# Altium PCB PCB1.PcbDoc
Units mm, origin at the board's own origin, x right, y up, seen from the top; angles counter-clockwise.
Board outline 65.28 x 35.31 mm, 2 copper layers (Top Layer, Bottom Layer); 25 components, 17 nets, 101 pads, 57 vias.
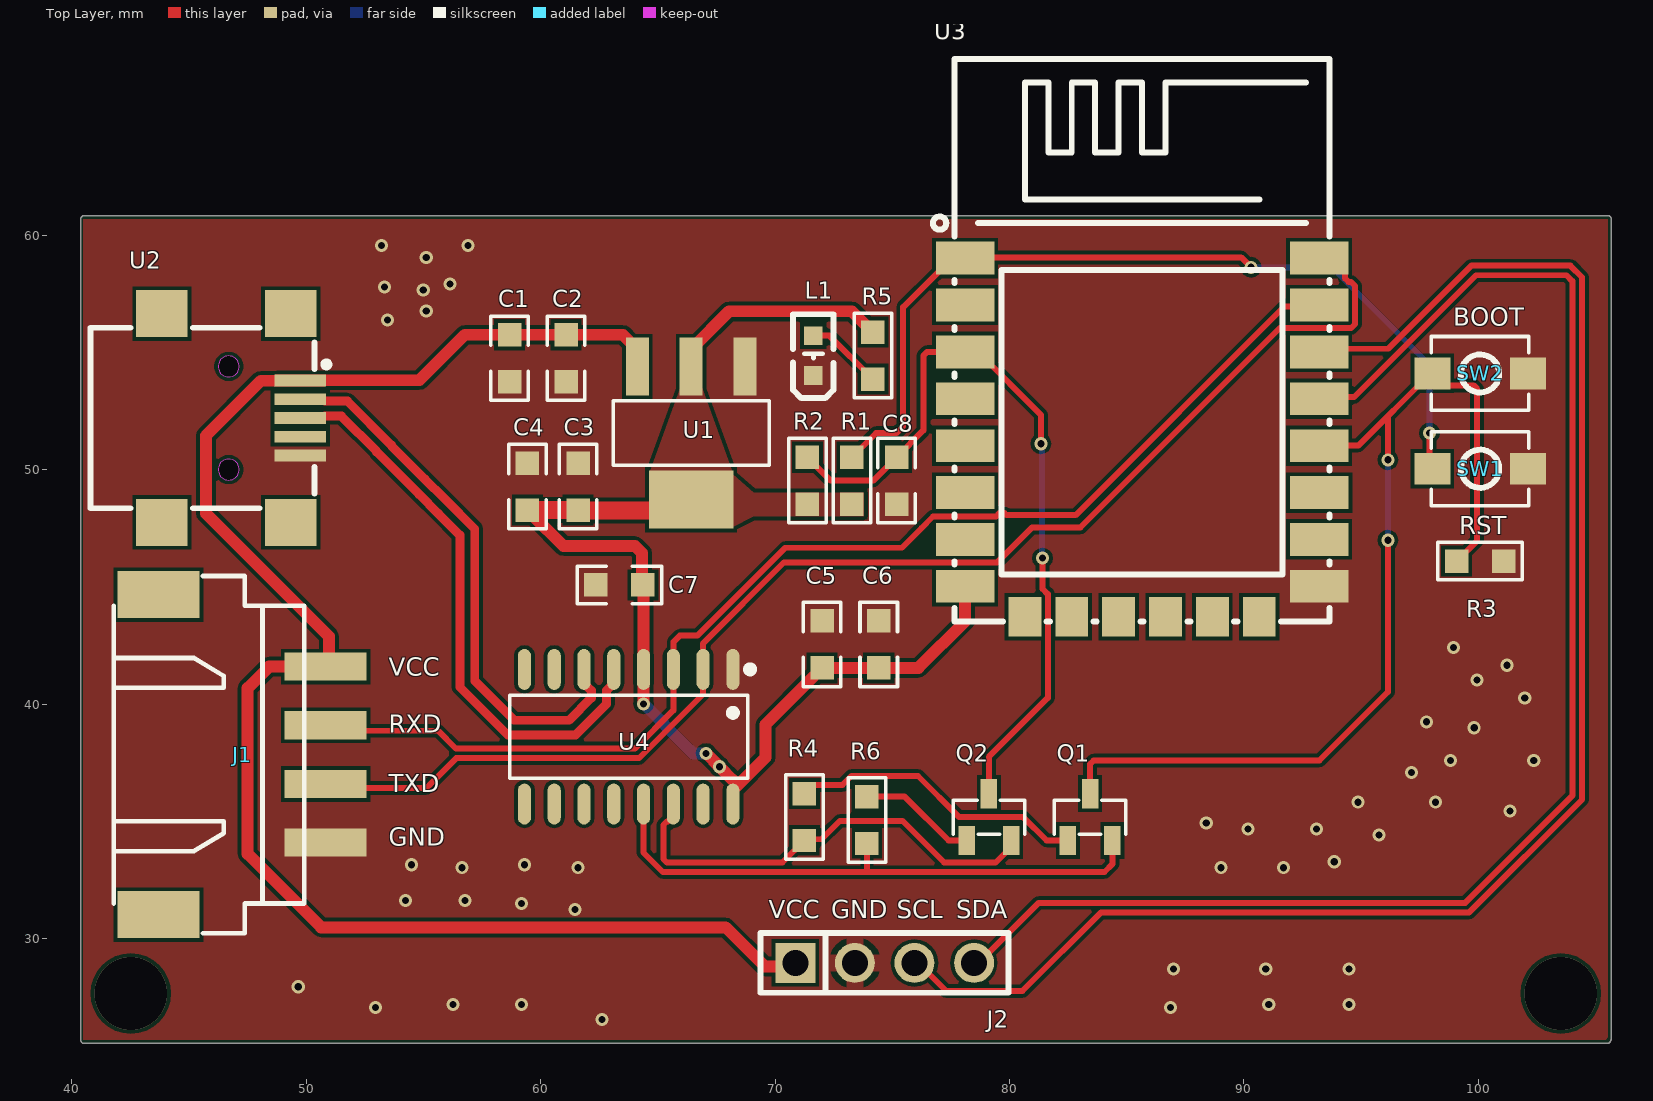
[diagram p0: Top Layer view]
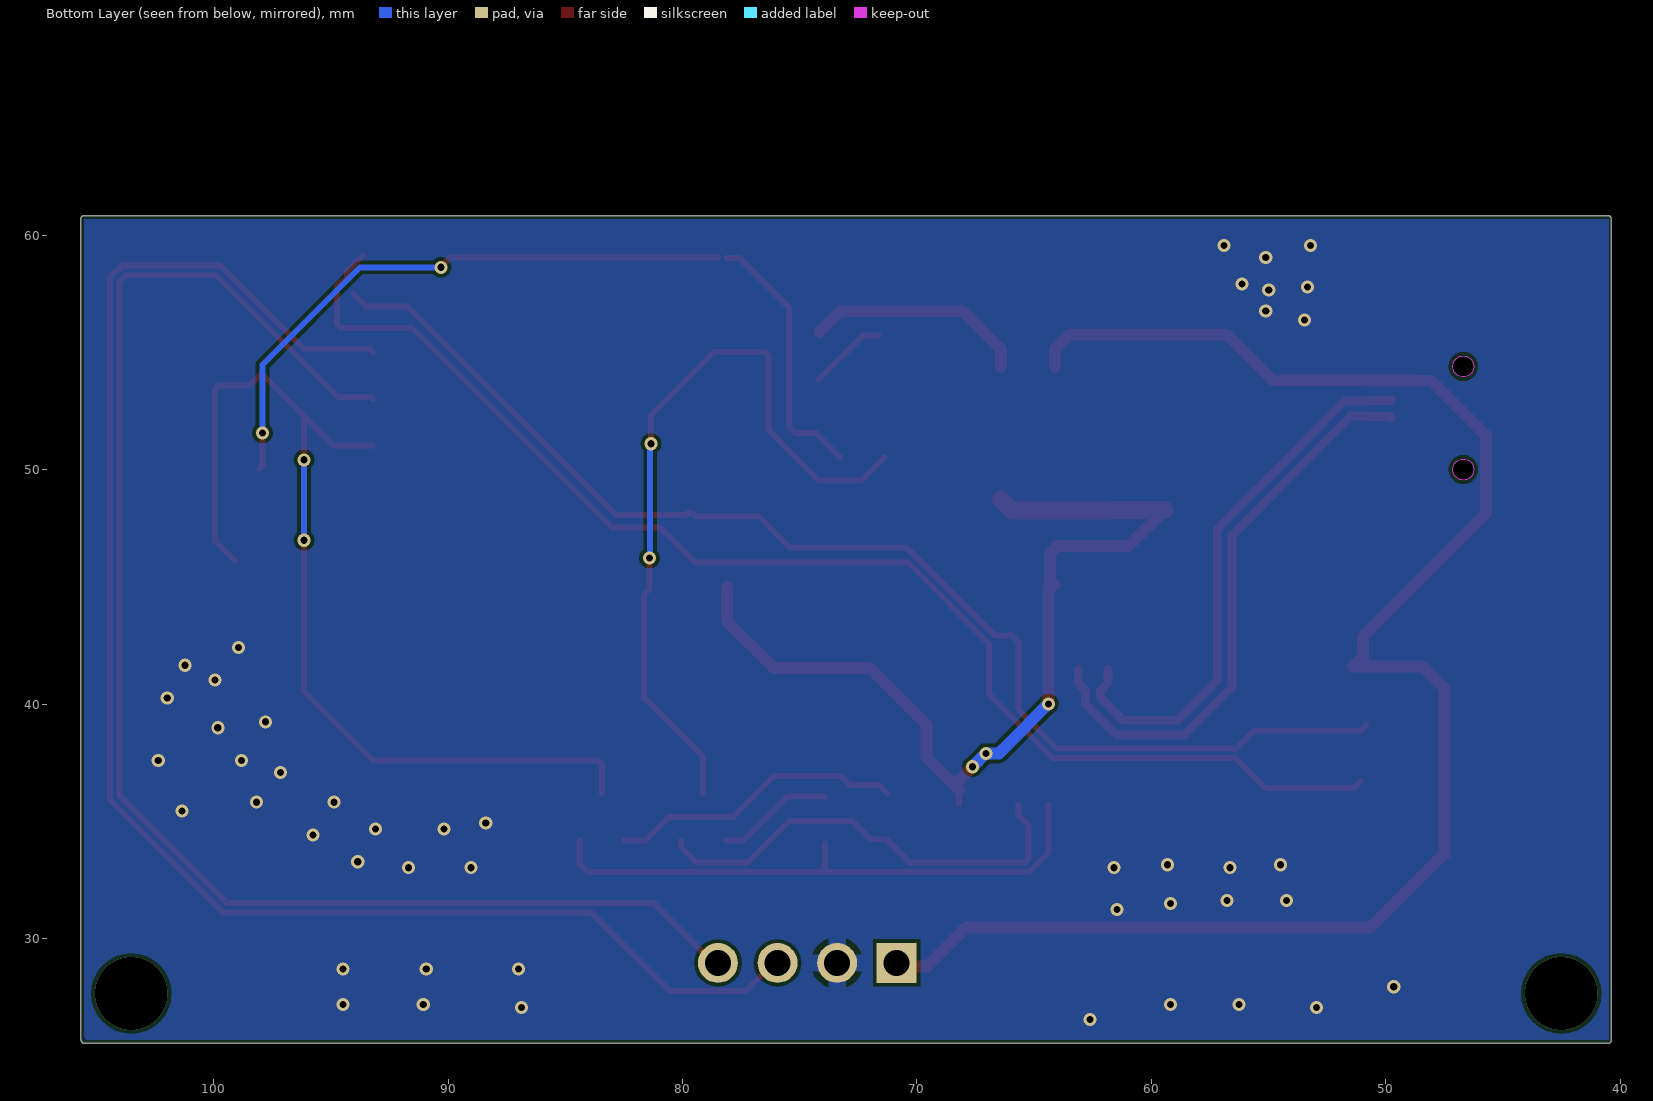
[diagram p1: Bottom Layer view, seen from below]

## Layer stack, top to bottom
Top Solder: solder mask 0.0102, Solder Resist, Dk 3.5
Top Layer: signal copper 0.0356
Dielectric 1: dielectric 0.32, FR-4, Dk 4.8
Bottom Layer: signal copper 0.0356
Bottom Solder: solder mask 0.0102, Solder Resist, Dk 3.5

## Board outline
40.388,25.68 cw(c40.513,25.706) 40.386,25.706 40.386,60.706 cw(c40.513,60.706) 40.513,60.833 105.513,60.833 cw(c105.513,60.706) 105.525,60.833 cw(c105.537,60.706) 105.664,60.706 105.664,25.706 cw(c105.537,25.706) 105.638,25.628 cw(c105.513,25.654) 105.513,25.527 40.513,25.527 cw(c40.513,25.654)

## Design rules (kind name [scope] priority, off if disabled: settings)
Clearance [All] p1: gap=0.152 ignorepadtopadclearanceinfootprint=FALSE
DiffPairsRouting [All] p1: maxlimit=0.254 minlimit=0.254 mostfreqgap=0.254 toplayer_minwidth=0.152 toplayer_maxwidth=0.381 toplayer_prefwidth=0.152 bottomlayer_minwidth=0.152 bottomlayer_maxwidth=0.381 bottomlayer_prefwidth=0.152 maxuncoupledlength=12.7
PolygonConnect [All] p1: thpad.connectstyle=Relief thpad.reliefconductorwidth=0.762 thpad.reliefentries=4 thpad.polygonreliefangle="90 Angle" thpad.airgapwidth=0.254 smdpad.connectstyle=Direct smdpad.reliefconductorwidth=0.762 smdpad.reliefentries=4 smdpad.polygonreliefangle="90 Angle" smdpad.airgapwidth=0.127 via.connectstyle=Direct via.reliefconductorwidth=0.254 via.reliefentries=4 via.polygonreliefangle="90 Angle" via.airgapwidth=0.254
RoutingVias [All] p1: holewidth=0.305 width=0.559 viastyle="Through Hole" minholewidth=0.305 minwidth=0.559 maxholewidth=0.305 maxwidth=0.559
SolderMaskExpansion [All] p1: expansion=0.102 istentingtop=FALSE
Width PWR [InNetClass('PWR')] p1: maxlimit=2.286 minlimit=0.508 preferedwidth=0.508
Width [All] p2: maxlimit=0.254 minlimit=0.254 preferedwidth=0.254
29 further rules are at their usual default settings.

## Classes and differential pairs
differential pair D: +D_P -D_N

## Components (designator, comment, footprint, x,y, rotation, side; value= is the part's Value field where it differs from the comment)
C1 "100nF" 0805C 58.674,54.753 r90 top
C2 "10uF" 0805C 61.087,54.753 r90 top
C3 "100nF" 0805C 61.595,49.276 r270 top
C4 "10uF" 0805C 59.436,49.276 r270 top
C5 "100nF" 0805C 72.009,42.545 r270 top
C6 "10uF" 0805C 74.422,42.545 r270 top
C7 "100nF" 0805C 63.357,45.085 r180 top
C8 "1uF" 0805C 75.184,49.53 r90 top
J1 "SIP4" XH2.54-WS-4P 45.847,37.846 r270 top
J2 "SIP4" SIP_4P-P2.54-V-F 74.676,28.956 r0 top
L1 "LED" LED0603-R-RD_GREEN 71.628,54.864 r90 top
Q1 "SS8050" SOT-23-3_L2.9-W1.3-P1.90-LS2.4-BR 83.439,35.179 r270 top
Q2 "SS8050" SOT-23-3_L2.9-W1.3-P1.90-LS2.4-BR 79.121,35.179 r270 top
R1 "10k" 0805R 73.279,49.53 r90 top
R2 "10k" 0805R 71.374,49.53 r90 top
R3 "10k" 0805R 100.076,46.101 r0 top
R4 "10k" 0805R 71.247,35.179 r90 top
R5 "1k" 0805R 74.168,54.864 r270 top
R6 "10k" 0805R 73.914,35.052 r90 top
SW1 "TS342A2P 250gf-WZ 021_C2987973" SW-SMD_L4.0-W2.9-LS5.0 100.076,50.038 r0 top
SW2 "TS342A2P 250gf-WZ 021_C2987973" SW-SMD_L4.0-W2.9-LS5.0 100.076,54.102 r0 top
U1 "Ams1117" SOT-223-4_L6.5-W3.5-P2.30-LS7.0-BR 66.421,51.562 r90 top
U2 "USB" USB-SMD_MINI-5PTP 46.794,52.203 r270 top
U3 "ESP-12F(ESP8266MOD)" ESP-12F_SMD 85.656,51.372 r270 top value=2.4GHz
U4 "CH340C" SOP16_L10.0-W3.9-P1.27-LS6.0-BL 63.754,38.608 r180 top

## Footprints (in the part's own frame and the unit in brackets; to place one, negate y for a bottom-side part, rotate by r counter-clockwise, add the part's x,y. Pads: shape width x height; smd on the part's side, far side on the other; paste and mask are expansions set on the pad)
0805C [mm]
  rect 1x1 smd: 1(-1,0) 2(1,0)
  silkscreen extent -1.8,-0.8 1.8,0.8
0805R [mm]
  rect 1x1 smd: 1(-1,0) 2(1,0)
  silkscreen extent -1.8,-0.8 1.8,0.8
ESP-12F_SMD [mm]
  rect 1.4x2.5 smd mask+0.051: 1(-7.651,-7.551) 2(-5.651,-7.551) 3(-3.651,-7.551) 4(-1.651,-7.551) 5(0.349,-7.551) 6(2.349,-7.551) 7(4.349,-7.551) 8(6.349,-7.551) 9(6.349,7.549) 10(4.349,7.55) 11(2.349,7.551) 12(0.349,7.551) 13(-1.651,7.55) 14(-3.651,7.551) 15(-5.651,7.55) 16(-7.651,7.551)
  rect 1.7x1.4 smd mask+0.051: 17(7.651,-5) 18(7.649,-3.002) 19(7.65,-1.003) 20(7.65,0.997) 21(7.65,2.997) 22(7.65,4.997)
  silkscreen extent -16.15,-8.92 7.85,8
LED0603-R-RD_GREEN [mm]
  rect 0.8x0.8 smd mask+0.051: 1(0.851,0) 2(-0.851,0)
  silkscreen extent -1.82,-0.86 1.77,0.86
SIP_4P-P2.54-V-F [mm]
  rect 1.7x1.7 hole 1.1 mask+0.051: 1(-3.81,0)
  round 1.7 hole 1.1 mask+0.051: 2(-1.27,0) 3(1.27,0) 4(3.81,0)
  silkscreen extent -5.29,-1.27 5.29,1.27
SOP16_L10.0-W3.9-P1.27-LS6.0-BL [mm] "CH340C"
  oval 0.56x1.745 smd mask+0.051: 1(-4.445,-2.872) 2(-3.175,-2.872) 3(-1.905,-2.872) 4(-0.635,-2.872) 5(0.635,-2.872) 6(1.905,-2.872) 7(3.175,-2.872) 8(4.445,-2.872) 9(4.445,2.872) 10(3.175,2.872) 11(1.905,2.872) 12(0.635,2.872) 13(-0.635,2.872) 14(-1.905,2.872) 15(-3.175,2.872) 16(-4.445,2.872)
  silkscreen extent -5.33,-3.02 5.08,1.77
SOT-23-3_L2.9-W1.3-P1.90-LS2.4-BR [mm]
  rect 1.25x0.7 smd mask+0.051: 1(1,-0.95) 2(1,0.95) 3(-1,0)
  silkscreen extent -0.73,-1.53 0.73,1.53
SOT-223-4_L6.5-W3.5-P2.30-LS7.0-BR [mm] "AMS1117"
  rect 2.47x0.98 smd mask+0.051: 1(2.835,-2.3) 2(2.835,0) 3(2.835,2.3)
  rect 2.47x3.6 smd mask+0.051: 4(-2.835,0)
  silkscreen extent -1.37,-3.33 1.37,3.33
SW-SMD_L4.0-W2.9-LS5.0 [mm]
  rect 1.53x1.36 smd mask+0.051: 1(-2.035,0) 2(2.035,0)
  silkscreen extent -2.08,-1.58 2.08,1.58
USB-SMD_MINI-5PTP [mm]
  rect 0.5x2.2 smd mask+0.051: 1(-1.6,2.95) 2(-0.8,2.95) 3(0,2.95) 4(0.8,2.95) 5(1.6,2.95)
  rect 2x2.2 smd mask+0.051: 6(-4.45,2.55) 7(4.45,2.55) 8(4.45,-2.95) 9(-4.45,-2.95)
  Keep-Out Layer board cut-out: -1.75,-0.1 -1.795,0.095 -1.919,0.252 -2.1,0.339 -2.3,0.339 -2.481,0.252 -2.605,0.095 -2.65,-0.1 -2.65,-0.1 -2.605,-0.295 -2.481,-0.452 -2.3,-0.539 -2.1,-0.539 -1.919,-0.452 -1.795,-0.295 -1.75,-0.1
  Keep-Out Layer board cut-out: 2.65,-0.1 2.605,0.095 2.481,0.252 2.3,0.339 2.1,0.339 1.919,0.252 1.795,0.095 1.75,-0.1 1.75,-0.1 1.795,-0.295 1.919,-0.452 2.1,-0.539 2.3,-0.539 2.481,-0.452 2.605,-0.295 2.65,-0.1
  silkscreen extent -3.85,-6 3.85,4.19
XH2.54-WS-4P [mm] "长：15mm，宽：8mm，高：6.1mm"
  rect 2x3.5 smd: 0(-6.827,-2.15) 0(6.827,-2.15)
  rect 1.2x3.5 smd: 1(-3.75,4.981) 2(-1.25,4.981) 3(1.25,4.981) 4(3.75,4.981)
  silkscreen extent -7.62,-4.06 7.62,4.06, body extent -7.5,-4 7.5,6.42, height 6.05

## Part data
C1 C2 C3 C4 C5 C6 C7 C8: library part CAP, "电容"
J1 J2: "jointbar"
R1 R2 R3 R4 R5 R6: library part RES, "电阻"
SW1 SW2: library part SW, Actuator/Cap Color=黑色, Contact Current=50mA, Insulation Resistance=100MΩ, JLCPCB Part Class="Extended Part", LCSC Part Name="TS342A2P 250gf-WZ 021", Manufacturer="SHOU HAN(首韩)", Operating Force=250gf@±50gf, Operating Temperature=-20℃~+70℃, Voltage Rating (DC)=12V, Actuator Style=圆形按钮, Add into BOM=yes, Circuit=单刀单掷, Convert to PCB=yes, Datasheet=https://atta.szlcsc.com/upload/public/pdf/source/20211019/B0840D9D2EDA6B165E59EB2CD177CDC8.pdf, Device="TS342A2P 250gf-WZ 021_C2987973", Manufacturer Part="TS342A2P 250gf-WZ 021", Mechanical Life=100000, Mounting Style=立贴, Name="TS342A2P 250gf-WZ 021", Pin Style=SMD接片, Strike Gundam=否, Supplier=LCSC, Supplier Footprint=SMD, Supplier Part=C2987973, Switch Height=2mm, Switch Length=3.95mm, Switch Width=2.9mm, Symbol="TS342A2P 250GF-WZ 021_C2987973"
U3: JLCPCB Part Class="Extended Part", Manufacturer=Ai-Thinker(安信可), Operating Temperature=-40℃~+85℃, Operating Voltage=3.3V, Output Power=16dBm, Receive  Current=120mA, Send  Current=170mA, Add into BOM=yes, Antenna Type="PCB 板载天线", Convert to PCB=yes, Core Processor=ESP8266, Datasheet=https://atta.szlcsc.com/upload/public/pdf/source/20210219/C82891_ABD84A460F4F056A2757267CCCA4B508.pdf, Device=ESP-12F(ESP8266MOD), LCSC Part Name=ESP-12F(ESP8266MOD), Manufacturer Part=ESP-12F(ESP8266MOD), Name=2.4GHz, Sensitivity=-90dBm, Supplier=LCSC, Supplier Footprint="WIFI Module", Supplier Part=C82891, Support Interface=GPIO；UART；IIC；PWM；SPI；ADC, Symbol=ESP-12F(ESP8266MOD), Wireless Standard=802.11b/g/n
U4: JLCPCB Part Class="Extended Part", Manufacturer=WCH(南京沁恒), Supply Voltage=3.3V；5V, Add into BOM=yes, Applications Function=Transceiver, Convert to PCB=yes, Data Rate=2Mbps, Datasheet=https://atta.szlcsc.com/upload/public/pdf/source/20200819/C84681_ADBED554CE321879DBD6B1D06488689C.pdf, Device=CH340C, LCSC Part Name=CH340C, Manufacturer Part=CH340C, Name=CH340C, Protocol="USB 2.0", Supplier=LCSC, Supplier Footprint=SOP-16, Supplier Part=C84681, Symbol=CH340C

## Via types
v1: diameter 0.559, hole 0.305, Top Layer to Bottom Layer, tented both sides, 55 vias
v2: diameter 3.1, hole 3.1, Top Layer to Bottom Layer, 2 vias

## Nets (pads, with @x,y where several pads share a name; then routed paths per layer and width w, separated by ;. In a path a pad name is that pad's centre, name@x,y a point inside that pad or via, vN(x,y) a via of type N, cw(c..) or ccw(c..) an arc to the next point about the centre after c; other vN are vias at no path point)
3.3V: C3.2 C4.2 C5.2 C6.2 C7.1 R1.1 R2.1 R5.1 U1.2 U1.4 U3.8 U4.4 U4.16 | length 50.8
  Top Layer w0.254: 68.198,36.754 68.198,36.323 68.199,36.322 U4.16
  Top Layer w0.508: C4.2@59.648,48.064 60.976,46.736 64.029,46.736 64.327,46.438 64.327,45.115 C7.1 ; C7.1@64.135,45.085 64.381,44.839 64.381,44.549 64.389,44.541 U4.4 v1(64.389,40.005) ; U1.2 66.421,55.142 68.034,56.755 73.277,56.755 R5.1 ; v1(67.057,37.895) v1(67.628,37.324) 68.198,36.754 ; U4.16@68.199,36.322 68.199,36.328 69.596,37.725 69.596,39.132 C5.2 76.112,41.545 78.106,43.538 U3.8
  Top Layer w0.762: C4.2 C3.2 61.612,48.259 65.953,48.259 U1.4
  Bottom Layer w0.508: v1(64.389,40.005) 66.167,38.227 66.499,37.895 v1(67.057,37.895) v1(67.628,37.324)
D_N: U2.2 U4.6 | length 23.6
  Top Layer w0.381: U2.2 49.803,52.944 50.772,52.944 50.795,52.921 51.759,52.921 53.634,51.046 53.634,51.023 55.059,49.598 55.899,48.758 57.189,47.469 57.189,40.992 58.869,39.311 61.218,39.311 62.166,40.26 62.166,40.575 61.849,40.893 U4.6
D_P: U2.3 U4.5 | length 24.7
  Top Layer w0.381: U2.3 49.803,52.263 50.772,52.263 50.795,52.286 51.496,52.286 52.999,50.783 52.999,50.76 54.816,48.943 55.636,48.123 56.554,47.205 56.554,40.728 58.606,38.676 61.481,38.676 62.801,39.997 62.801,40.575 63.119,40.893 U4.5
DTR: Q1.2 R6.1 U4.13 | length 24.8
  Top Layer w0.254: U4.13 64.389,33.661 65.215,32.835 73.914,32.835 ; R6.1 73.914,32.835 ; Q1.2 84.389,33.173 84.051,32.835 73.914,32.835
EN: C8.2 Q2.3 R2.2 U3.3 | length 32.9
  Top Layer w0.254: R2.2 72.371,49.533 74.187,49.533 C8.2 76.327,51.673 76.327,54.864 76.486,55.023 78.655,55.023 81.339,52.339 81.339,51.247 v1@81.257,51.165 ; Q2.3 79.121,37.749 81.636,40.263 81.636,44.688 81.407,44.916 v1(81.407,46.228)
  Bottom Layer w0.254: v1(81.339,51.107) 81.377,51.069 81.377,46.258 v1(81.407,46.228)
GND: C1.1 C2.1 C3.1 C4.1 C5.1 C6.1 C7.2 C8.1 J1.4 J2.2 L1.2 R3.2 SW1.2 SW2.2 U1.1 U2.5 U3.9 U4.1
  other v1: 62.611,26.543 52.959,27.051 86.868,27.051 56.261,27.178 59.182,27.178 91.059,27.178 94.488,27.178 49.657,27.94 86.995,28.702 90.932,28.702 94.488,28.702 61.468,31.242 59.182,31.496 54.229,31.623 56.769,31.623 56.642,33.02 61.595,33.02 89.027,33.02 91.694,33.02 54.483,33.147 59.309,33.147 93.853,33.274 95.758,34.417 90.17,34.671 93.091,34.671 88.392,34.925 101.346,35.433 94.869,35.814 98.171,35.814 97.155,37.084 98.806,37.592 102.362,37.592 99.822,38.989 97.79,39.243 101.981,40.259 99.949,41.021 101.219,41.656 98.933,42.418 53.467,56.388 55.118,56.769 54.991,57.658 53.34,57.785 56.134,57.912 55.118,59.055 53.213,59.563 56.896,59.563
GPIO0: Q1.3 R3.1 SW2.1 U3.12 | length 42.9
  Top Layer w0.254: Q1.3 83.439,37.443 83.588,37.592 93.218,37.592 96.139,40.513 v1(96.139,46.99) ; U3.12 94.877,51.023 97.956,54.102 98.464,53.594 99.8,53.594 99.949,53.445 99.949,46.974 R3.1 ; v1(96.139,50.419) 96.139,52.2
  Bottom Layer w0.254: v1(96.139,46.99) v1(96.139,50.419)
NetL1_1: L1.1 R5.2 | length 3.3
  Top Layer w0.254: L1.1 72.317,55.715 R5.2
NetQ1_1: Q1.1 R4.2 | length 12.7
  Top Layer w0.254: R4.2 71.62,36.552 72.875,36.552 73.256,36.933 76.097,36.933 77.851,35.179 80.585,35.179 81.585,34.179 Q1.1
NetQ2_1: Q2.1 R6.2 | length 5
  Top Layer w0.254: R6.2 75.528,36.052 77.401,34.179 Q2.1
RST: R1.2 SW1.1 U3.1 | length 37.1
  Top Layer w0.254: R1.2 74.311,51.562 75.184,51.562 75.464,51.842 75.464,56.932 77.555,59.023 U3.1 ; U3.1@78.486,59.055 89.884,59.055 v1(90.308,58.631) ; v1(97.917,51.562) 97.917,50.162 SW1.1
  Bottom Layer w0.254: v1(90.308,58.631) 93.76,58.631 97.917,54.474 v1(97.917,51.562)
RTS: Q2.2 R4.1 U4.14 | length 19.5
  Top Layer w0.254: U4.14 65.659,35.226 65.425,34.992 65.383,34.992 65.235,34.843 65.235,33.39 65.383,33.241 70.309,33.241 71.3,34.232 71.979,34.232 72.761,35.014 75.442,35.014 77.214,33.241 79.408,33.241 80.071,33.904 Q2.2
RXD: J1.2 U3.15 U4.3 | length 53.4
  Top Layer w0.254: J1.2 51.062,38.862 55.626,38.862 56.388,38.1 64.025,38.1 65.659,39.734 U4.3 65.675,41.497 65.675,42.659 65.934,42.918 66.682,42.918 70.433,46.669 75.413,46.669 76.244,47.5 76.244,47.507 76.739,48.002 79.43,48.002 79.569,48.142 79.779,48.142 79.864,48.057 82.823,48.057 91.725,56.958 93.5,56.958 U3.15@94.041,57.499
SCL: J2.3 U3.14 | length 67.6
  Top Layer w0.254: J2.3@75.946,29.106 77.289,27.763 80.556,27.763 83.908,31.115 99.609,31.115 104.419,35.925 104.419,58.207 103.927,58.699 99.698,58.699 96.157,55.158 93.342,55.158 U3.14
SDA: J2.4 U3.13 | length 63.6
  Top Layer w0.254: J2.4@78.516,28.792 81.246,31.521 99.441,31.521 104.013,36.093 104.013,58.039 103.759,58.293 99.897,58.293 94.704,53.1 93.283,53.1 U3.13
TXD: J1.3 U3.16 U4.2 | length 56.7
  Top Layer w0.254: J1.3@51.054,36.703 51.341,36.416 55.121,36.416 56.399,37.694 64.196,37.694 66.929,40.427 66.929,42.59 70.383,46.044 79.471,46.044 80.964,47.537 83.028,47.537 91.535,56.044 94.573,56.044 94.736,56.207 94.736,57.839 94.573,58.002 94.465,58.002 94.316,58.151 94.316,58.464 U3.16@93.641,59.14
VCC: C1.2 C2.2 J1.1 J2.1 U1.3 U2.1 | length 70.2
  Top Layer w0.508: U1.3 64.121,55.142 63.51,55.753 C2.2 C1.2 56.769,55.753 54.829,53.813 50.749,53.813 50.744,53.807 49.748,53.807 49.74,53.799 48.743,53.799 48.735,53.791 48.064,53.791 45.72,51.447 45.72,48.136 50.965,42.891 50.965,41.942 51.056,41.942 51.402,41.596 J1.1 48.415,41.596 47.498,40.679 47.498,33.611 50.636,30.473 67.887,30.473 69.552,28.808 70.718,28.808 J2.1
pads on no net: J1.0 U2.4 U2.6 U2.7 U2.8 U2.9 U3.2 U3.4 U3.5 U3.6 U3.7 U3.10 U3.11 U3.17 U3.18 U3.19 U3.20 U3.21 U3.22 U4.7 U4.8 U4.9 U4.10 U4.11 U4.12 U4.15
copper on no net:
  other v2: 42.513,27.654 103.513,27.654

## Polygon pours and split planes (outlines as drawn)
GND on Top Layer "NONET_L-01_P-001" (solid, pour order 12): 40.489,60.682 105.513,60.682 105.513,25.654 105.489,25.63 105.437,25.682 40.489,25.682
3.3V on Top Layer "NONET_L-01_P-001" (solid, pour order 2): 68.072,49.911 69.088,49.022 73.787,49.022 73.787,48.006 69.088,48.006 68.072,47.498
3.3V on Top Layer "NONET_L-01_P-001" (solid, pour order 4): 65.951,53.467 64.623,49.777 68.226,49.764 66.886,53.467
GND on Bottom Layer "NONET_L-01_P-001" (solid, pour order 13): 40.489,60.682 105.513,60.682 105.513,25.654 105.489,25.63 105.437,25.682 40.489,25.682

## Silkscreen, mask and mechanical layers (free items; w line width, h text height)
Top Overlay:
  text "BOOT" at 98.933,56.134 h0.76
  text "RST" at 99.187,47.244 h0.76
  text "VCC" at 53.523,41.198 h0.76
  text "RXD" at 53.523,38.785 h0.76
  text "TXD" at 53.523,36.245 h0.76
  text "GND" at 53.523,33.959 h0.76
  text "VCC" at 69.723,30.861 h0.76
  text "GND" at 72.39,30.861 h0.76
  text "SCL" at 75.184,30.861 h0.76
  text "SDA" at 77.724,30.861 h0.76
Mechanical 1:
  pour cut-out: 42.418,60.706
  lines w0.254: 40.513,25.654 105.513,25.654 ; 40.513,25.706 40.513,60.706 105.513,60.706 ; 105.537,25.706 105.537,60.706